# EAGLE board PR8003 (EAGLE 6.6.0)
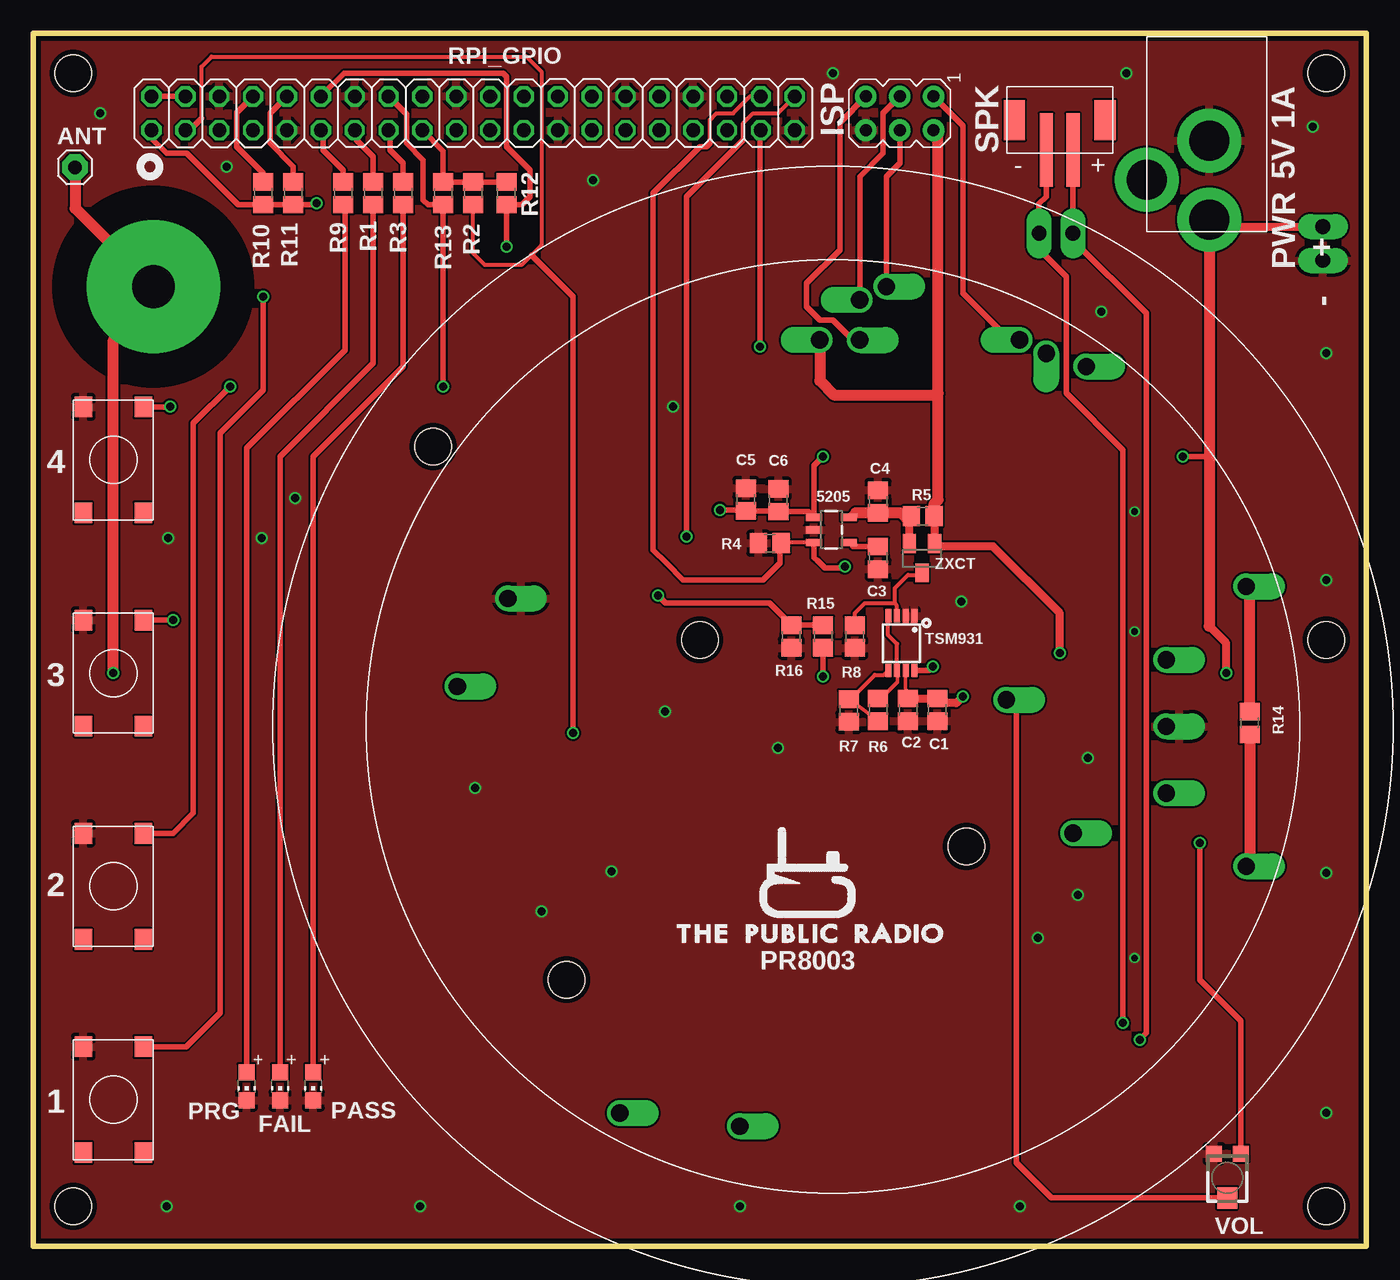
[diagram p0: board, top side]
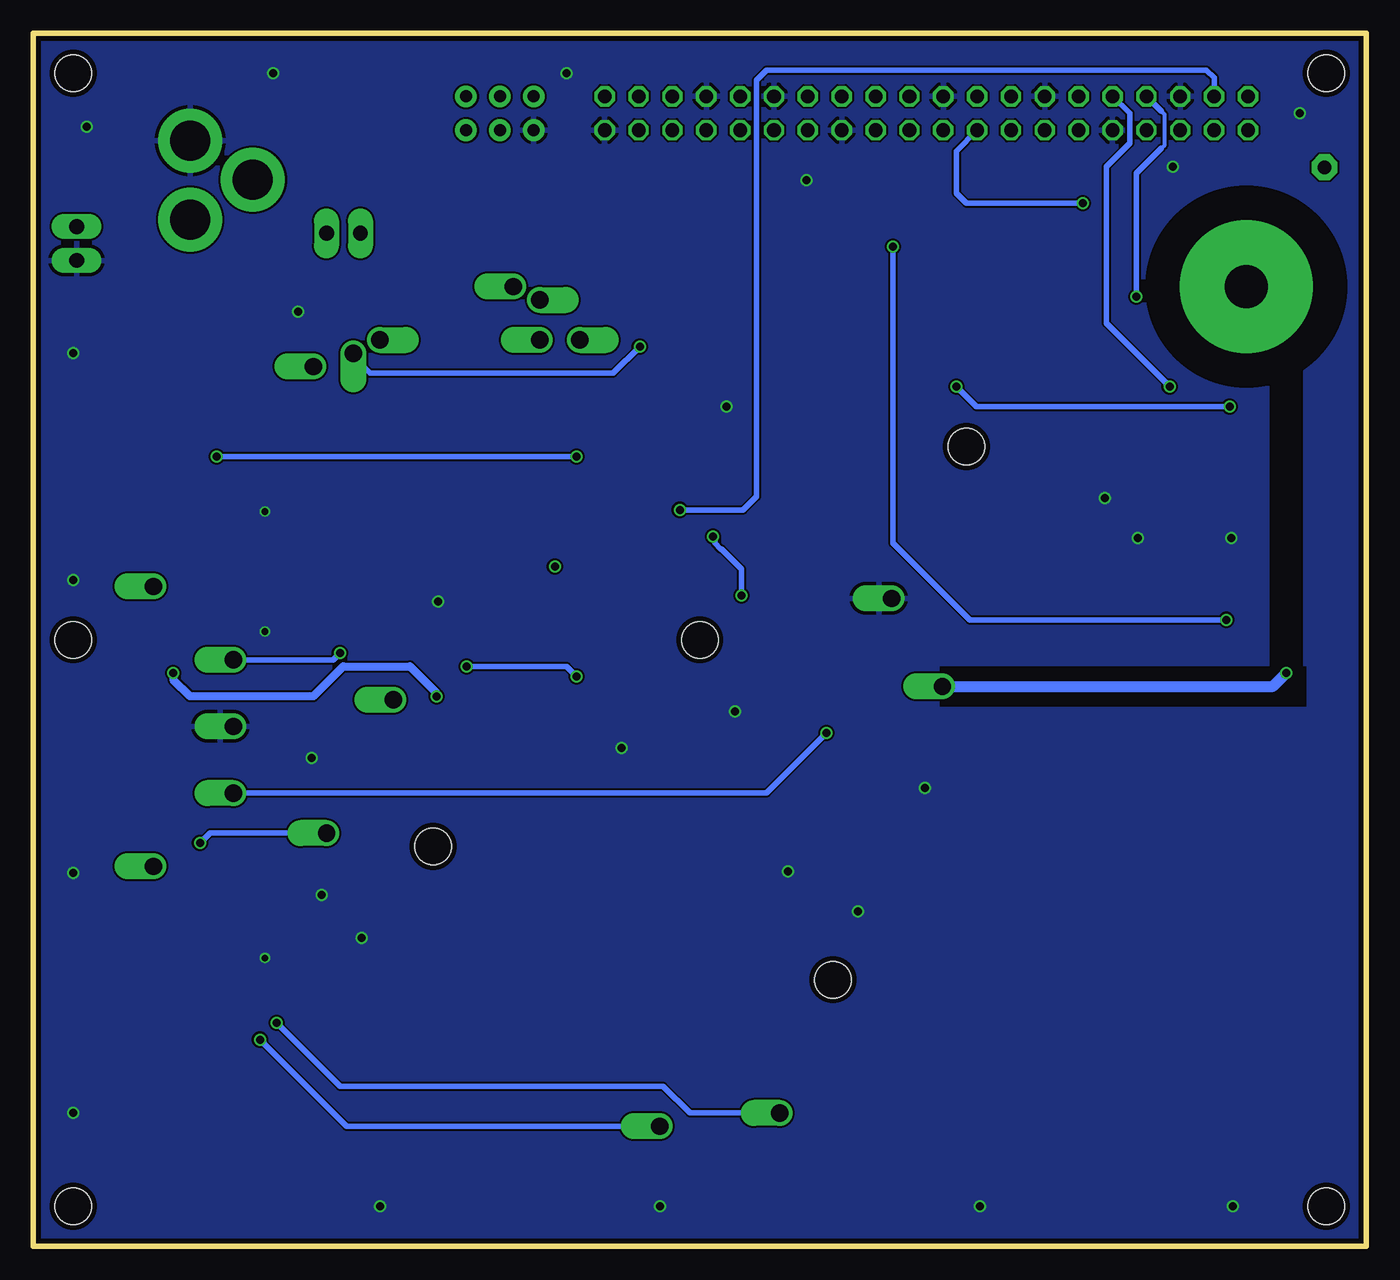
[diagram p1: board, bottom side, seen from below]

Size 100 x 91 mm. Coordinates in mm from the lower left corner, seen from the top.
Outline: 0,0 100,0 100,91 0,91 0,0
Copper layers (1*16): Top 0.0356mm / dielectric 1.5011mm / Bottom 0.0356mm
Design rules "LaenPCBOrder *": minimum track width 6mil, minimum drill 13mil, track to track 6mil, track to pad 6mil, pad to pad 6mil, via to via 6mil, smd to smd 6mil, copper to edge 15mil, drill to drill 6mil, minimum pad ring 7mil, minimum via ring 5mil, stop-mask expansion 3mil, vias tented up to drill 0mil, thermal gap 10mil
Net classes: 1 antenna: clearance 1.27 mm
Holes 2.75 mm at 3,3 3,88 97,88 50,45.5 97,3 70,30 40,20 97,45.5 30,60
bRestrict: area 4.5,40.5 to 32,43.5; area 4.8,43.5 to 7.2,68

## Footprints (pad centres in the part's own frame; a part is rotated, then mirrored left to right if it is on the bottom)
SOT23-5 = smd 0.55 x 1.2: 1 -0.95,-1.3; 2 0,-1.3; 3 0.95,-1.3; 4 0.95,1.3; 5 -0.95,1.3
1X01 = drill 1.016 pad 1.93 octagon: 1 0,0
C0805 = smd 1.3 x 1.5: 1 -0.85,0; 2 0.85,0
0805_ADAFRUIT = smd 1.3 x 1.5: 1 -0.85,0; 2 0.85,0
JST-B2B-PH-SM4-TB = smd 1 x 5.5: 1 1,-2.75; 2 -1,-2.75 | smd 1.6 x 3: NC1 -3.4,-0.5; NC2 3.4,-0.5
CHIP-LED0805 = smd 1.2 x 1.2: A 0,-1.05; C 0,1.05
AVRISP = drill 0.9 pad 1.626: 1 -1.27,2.54; 2 1.27,2.54; 3 -1.27,0; 4 1.27,0; 5 -1.27,-2.54; 6 1.27,-2.54
M3_BOLT_HOLE = drill 3.2 pad 10: P$1 0,0
1X02_LONGPADS = drill 1.118 pad 1.88 long: 1 0,0; 2 2.54,0
2X20 = drill 1.016 octagon: 1 -24.13,-1.27; 2 -24.13,1.27; 3 -21.59,-1.27; 4 -21.59,1.27; 5 -19.05,-1.27; 6 -19.05,1.27; 7 -16.51,-1.27; 8 -16.51,1.27; 9 -13.97,-1.27; 10 -13.97,1.27; 11 -11.43,-1.27; 12 -11.43,1.27; 13 -8.89,-1.27; 14 -8.89,1.27; 15 -6.35,-1.27; 16 -6.35,1.27; 17 -3.81,-1.27; 18 -3.81,1.27; 19 -1.27,-1.27; 20 -1.27,1.27; 21 1.27,-1.27; 22 1.27,1.27; 23 3.81,-1.27; 24 3.81,1.27; 25 6.35,-1.27; 26 6.35,1.27; 27 8.89,-1.27; 28 8.89,1.27; 29 11.43,-1.27; 30 11.43,1.27; 31 13.97,-1.27; 32 13.97,1.27; 33 16.51,-1.27; 34 16.51,1.27; 35 19.05,-1.27; 36 19.05,1.27; 37 21.59,-1.27; 38 21.59,1.27; 39 24.13,-1.27; 40 24.13,1.27
MSOP8 = smd 0.45 x 1: 1 -0.975,-2.05; 2 -0.325,-2.05; 3 0.325,-2.05; 4 0.975,-2.05; 5 0.975,2.05; 6 0.325,2.05; 7 -0.325,2.05; 8 -0.975,2.05
PJ-102A = drill 3 pad 4.8: RING 0.1,-3.39; RING_SW -4.6,-6.29; TIP 0.1,-9.29
C&K_PTS645_SMT = smd 1.55 x 1.3: P$1 -3.975,2.25; P$2 3.975,2.25; P$3 -3.975,-2.25; P$4 3.975,-2.25
PR9020_TESTPOINTS = drill 1.3 pad 1.3 offset: P$1 10.6,44.6; P$2 60,35; P$3 60,30; P$4 60,40; P$5 34,64; P$6 19,6; P$7 28,5; P$8 51,63; P$9 54,62; P$10 49,64; P$11 37,67; P$12 37,64; P$13 39,68; P$14 66,24.5; P$15 66,45.5; P$16 53,27; P$17 48,37; P$18 6.8,38
TC33X = smd 1.2 x 1.2: 1 -1,-1.825; 3 1,-1.825 | smd 1.5 x 1.6: 2 0,1.5
SOT23 = smd 1 x 1.4: 1 -0.95,-1.1; 2 0.95,-1.1; 3 0,1.1

## Placement (x,y rotation side)
5205  MIC5219 3.3V  [SOT23-5]  59.88,53.75 270 top
ANT  [1X01]  3.12,80.95 0 top
C1  2.2uF  [C0805]  67.83,40.25 270 top
C2  .1nF  [0805_ADAFRUIT]  65.62,40.25 270 top
C3  470pF  [0805_ADAFRUIT]  63.38,51.65 270 top
C4  4.7uF  [C0805]  63.38,55.88 90 top
C5  .1uF  [0805_ADAFRUIT]  53.45,56.02 90 top
C6  10nF  [C0805]  55.9,55.98 90 top
CN1  [JST-B2B-PH-SM4-TB]  77,85 0 top
FAIL  [CHIP-LED0805]  18.5,12 180 top
ISP  AVRISP-6  [AVRISP]  65,85 270 top
J1  M3_SCREW_POST  [M3_BOLT_HOLE]  9,72 0 top
JP2  M02PTH3  [1X02_LONGPADS]  78,76 180 top
JP3  M02PTH3  [1X02_LONGPADS]  96.75,76.5 270 top
PASS  [CHIP-LED0805]  21,12 180 top
PRG  [CHIP-LED0805]  16,12 180 top
R1  1k  [0805_ADAFRUIT]  25.5,79 270 top
R2  4.7k  [0805_ADAFRUIT]  33,79 270 top
R3  1k  [0805_ADAFRUIT]  27.75,79 270 top
R4  4.7k  [0805_ADAFRUIT]  55.25,52.75 0 top
R5  2ohm  [0805_ADAFRUIT]  66.72,54.77 180 top
R6  47k  [0805_ADAFRUIT]  63.38,40.25 90 top
R7  2.4M  [0805_ADAFRUIT]  61.17,40.2 270 top
R8  1.5K  [0805_ADAFRUIT]  61.62,45.75 270 top
R9  1k  [0805_ADAFRUIT]  23.25,79 270 top
R10  4.7k  [0805_ADAFRUIT]  17.25,79 90 top
R11  4.7k  [0805_ADAFRUIT]  19.5,79 90 top
R12  4.7k  [0805_ADAFRUIT]  35.5,79 270 top
R13  4.7k  [0805_ADAFRUIT]  30.75,79 270 top
R14  0 OHM  [0805_ADAFRUIT]  91.25,39.25 270 top
R15  2.2K  [0805_ADAFRUIT]  59.25,45.75 90 top
R16  3.3K  [0805_ADAFRUIT]  56.88,45.75 270 top
RPI_GPIO  [2X20]  33,85 0 top
TSM931  TSM931  [MSOP8]  65.12,45.25 180 top
U$1  [PR_LOGO]  58.08,28.35 0 top
U$19  2.1MMJACKTHM  [PJ-102A]  88.12,86.33 0 top
U$20  C&K_PTS645  [C&K_PTS645_SMT]  6,11 90 top
U$22  C&K_PTS645  [C&K_PTS645_SMT]  6,43 90 top
U$23  C&K_PTS645  [C&K_PTS645_SMT]  6,27 90 top
U$24  C&K_PTS645  [C&K_PTS645_SMT]  6,59 90 top
U$26  PR9020_TESTPOINTS  [PR9020_TESTPOINTS]  25,4 0 top
VOL  [TC33X]  89.58,5.12 180 top
ZXCT  ZXCT1009  [SOT23]  66.67,51.62 180 top

## Library data of the parts
5205 = SparkFun-PowerIC; PROD_ID: VREG-5205-3.0
ANT C1 C4 C6 FAIL ISP PASS PRG RPI_GPIO U$19 VOL = adafruit
C2 C3 C5 R1-R4 R6 R7 R9-R16 TSM931 U$1 U$26 ZXCT = PR_Parts_Library
CN1 = PR_Parts_Library; MFG_PN: B2B-PH-SM4-TB(LF)(SN)
J1 = PR_Parts_Library; MFG_PN: DNP
JP2 JP3 = SparkFun-Connectors
R5 = PR_Parts_Library; POWER: .5W; TOL: 1%
R8 = PR_Parts_Library; TOL: 1%
U$20 U$22-U$24 = PR_Parts_Library; MFG_PN: PTS645SM43SMTR92 LFS

## Nets
3.3V: ISP.2 R5.1 U$26.P$4 U$26.P$5 ZXCT.1
+3V3: R2.1 R10.1 R11.1 R12.1 R13.1 RPI_GPIO.1 RPI_GPIO.17
+5V: 5205.1 C1.1 C2.1 C5.1 C6.1 JP3.1 RPI_GPIO.2 RPI_GPIO.4 TSM931.7 U$19.TIP
A_IN: U$26.P$16 VOL.1
A_OUT: U$26.P$17 VOL.2
ANT: ANT.1 J1.P$1 U$26.P$18
COMPARATOR: R15.2 R16.1 RPI_GPIO.40
DEV_PRES: R2.2 RPI_GPIO.3 U$26.P$3
FAIL: R1.1 RPI_GPIO.13
GND: 5205.2 C1.2 C2.2 C3.2 C4.2 C5.2 C6.2 FAIL.C ISP.6 JP3.2 PASS.C PRG.C R4.1 R7.2 R8.2 R16.2 RPI_GPIO.6 RPI_GPIO.9 RPI_GPIO.14 RPI_GPIO.20 RPI_GPIO.25 RPI_GPIO.30 RPI_GPIO.34 RPI_GPIO.39 TSM931.1 TSM931.2 U$19.RING U$20.P$2 U$22.P$2 U$23.P$2 U$24.P$2 U$26.P$1 U$26.P$2 VOL.3
GPIO3: RPI_GPIO.5
GPIO4: RPI_GPIO.7
GPIO5: RPI_GPIO.29
GPIO6: RPI_GPIO.31
GPIO7: RPI_GPIO.26
GPIO8: RPI_GPIO.24
GPIO9: RPI_GPIO.21
GPIO10: RPI_GPIO.19
GPIO11: RPI_GPIO.23
GPIO12: RPI_GPIO.32
GPIO13: RPI_GPIO.33
GPIO16: RPI_GPIO.36
GPIO19: RPI_GPIO.35
GPIO24: RPI_GPIO.18
GPIO25: RPI_GPIO.22
ID_SC: RPI_GPIO.28
ID_SD: RPI_GPIO.27
MISO: ISP.1 U$26.P$10
MOSI: ISP.4 U$26.P$13
N$1: R6.2 TSM931.4 TSM931.6
N$2: PRG.A R9.2
N$3: FAIL.A R1.2
N$4: PASS.A R3.2
N$6: R15.1 TSM931.8
N$12: R8.1 TSM931.3 ZXCT.3
N$13: 5205.4 C3.1
N$14: 5205.5 C4.1 R5.2 ZXCT.2
N$15: R6.1 R7.1 TSM931.5
N$18: U$26.P$9
PASS: R3.1 RPI_GPIO.15
PROCESS: R9.1 RPI_GPIO.11
REG_ENABLE: 5205.3 R4.2 RPI_GPIO.38
RST: ISP.5 U$26.P$12
SCK: ISP.3 U$26.P$11
SPK_OUT+: CN1.2 JP2.2 U$26.P$6
SPK_OUT-: CN1.1 JP2.1 U$26.P$7
SW_IN: R14.2 U$26.P$14
SW_OUT: R14.1 U$26.P$15
TAC1: R10.2 RPI_GPIO.8 U$20.P$4
TAC2: R11.2 RPI_GPIO.10 U$23.P$4
TAC3: R12.2 RPI_GPIO.12 U$22.P$4
TAC4: R13.2 RPI_GPIO.16 U$24.P$4
TACSW: RPI_GPIO.37 U$26.P$8

## Tracks (layer width: path | path; a pad name or v marks a point on that pad's centre or on a via)
3.3V  (via drill 0.6)
  Top 0.305: 67.33,54.52 R5.1
  Top 0.406: 67.88,54.62 R5.1 67.25,54.65 | 67.5,83.69 ISP.2
  Top 0.61: ZXCT.1 67.62,54.73 R5.1 | 67.85,52.5 72,52.5 77,47.5 v77,44.5
  Top 0.813: 67.85,52.5 ZXCT.1 | U$26.P$5 59,64.94 60.06,63.88 67.75,63.88 67.88,64 | R5.1 67.58,55.7 67.88,56 67.88,64 | 67.88,64 67.88,83.39 ISP.2
  Bottom 0.406: U$26.P$4 77.5,44 v77,44.5
+3V3  (via drill 0.6)
  Top 0.406: RPI_GPIO.1 9,83.6 9,83 10,82 11.5,82 15.35,78.15 R10.1 R11.1 21.15,78.15 v21.25,78.25 | RPI_GPIO.17 30.75,82.17 R13.1 R2.1 R12.1
  Bottom 0.406: RPI_GPIO.17 30.75,82.17 30.75,79 30,78.25 21.75,78.25 v21.25,78.25
+5V  (via drill 0.6)
  Top 0.254: C2.1 65.62,41.62 65.44,41.81 65.44,43.19 TSM931.7
  Top 0.305: 55.85,55.17 C6.1 | 58.15,55.12 5205.1
  Top 0.406: 55.85,55.17 C5.1 53.38,55.25 v51.5,55.25 | C6.1 58.15,55.12 | 88.76,76.5 U$19.TIP | RPI_GPIO.2 RPI_GPIO.4 | 5205.1 58.58,58.58 v59.25,59.25 | v86.25,59.25 88.22,59.25
  Top 0.61: C2.1 C1.1 68.17,40.75 69.25,40.75 v69.75,41.25 | 88.76,76.5 JP3.1 | v89.5,43 89.5,45.25 88.22,46.52
  Top 0.813: U$19.TIP 88.22,59.25 88.22,46.52
  Bottom 0.406: RPI_GPIO.4 11.41,87.66 12,88.25 45,88.25 45.75,87.5 45.75,56.25 46.75,55.25 v51.5,55.25 | v59.25,59.25 v86.25,59.25 | 69.75,41.5 v69.75,41.25 | 89.5,42.5 v89.5,43
  Bottom 0.61: 69.75,41.5 71.75,43.5 76.75,43.5 79,41.25 88.25,41.25 89.5,42.5
A_IN  (via drill 0.6)
  Top 0.406: VOL.1 90.58,16.93 87.5,20 v87.5,30.25
  Bottom 0.406: U$26.P$16 86.75,31 v87.5,30.25
A_OUT
  Top 0.406: U$26.P$17 73.75,40.25 73.75,6.25 76.38,3.62 VOL.2
ANT  (via drill 0.6)
  Top 0.406: 8.9,72 J1.P$1
  Top 0.813: ANT.1 3.12,77.88 J1.P$1 9,71 6,68 v6,43
  Bottom 0.813: U$26.P$18 7,42 v6,43
COMPARATOR  (via drill 0.6)
  Top 0.305: 53.25,83 53.25,84.25 54,85 55.86,85 RPI_GPIO.40
  Top 0.406: v49,53.25 49,78.75 53.25,83 | R15.2 R16.1 55.23,48.25 47.44,48.25 v46.88,48.81
  Bottom 0.406: v46.88,48.81 46.88,50.81 48.38,52.31 48.44,52.31 48.88,52.75 48.88,53.12 v49,53.25
DEV_PRES  (via drill 0.6)
  Top 0.305: 12.62,84.62 12.62,88.5 13.38,89.25 37,89.25 38.12,88.12 38.12,75.12 37.38,74.38 36.62,73.62 33.88,73.62 33,74.5 R2.2
  Top 0.406: RPI_GPIO.3 11.73,83.73 12.62,84.62 | v40.5,38.5 40.5,71.25 37.38,74.38
  Bottom 0.406: U$26.P$3 45,34 v40.5,38.5
FAIL
  Top 0.406: R1.1 25.5,81.75 24.25,83 24.25,83.59 RPI_GPIO.13
GND  (via drill 0.5, 0.6)
  other vias: 38.12,25.12 43.38,28.12 78.38,26.38 75.38,23.12 47.38,40.12 33.12,34.38 55.88,37.38 10,3 29,3 53,3 74,3 97,10 97,28 97,50 97,67 96,84 5,85 17.12,53.12 10.12,53.12 19.62,56.12 80.12,70.12 82.62,21.62 82.62,55.12 82.62,46.12 82,88 60,88 42,80 14.5,81 48,63 69.62,48.38 79.12,36.62
  pour Top: 0,91 100,91 100,0 0,0
  pour Bottom: 0,0 100,0 100,91 0,91
MISO
  Top 0.406: U$26.P$10 73.25,68 69.75,71.5 69.75,84.06 ISP.1
MOSI
  Top 0.406: U$26.P$13 64,80.25 65,81.25 ISP.4
N$1
  Top 0.254: 64.75,42.25 64.81,42.31 64.81,43.19 TSM931.6
  Top 0.305: TSM931.4 64.12,47.27 64.12,45.88 64.8,45.2 TSM931.6 64.75,43.15 | R6.2 63.62,41.12 64.75,42.25
N$2
  Top 0.406: PRG.A 16,59.88 23.38,67.25 23.38,78.03 R9.2
N$3
  Top 0.406: FAIL.A 18.5,59.25 25.5,66.25 R1.2
N$4
  Top 0.406: PASS.A 21,59.25 27.75,66 R3.2
N$6  (via drill 0.6)
  Top 0.406: TSM931.8 67.2,43.2 v67.5,43.5 | v59.25,42.75 R15.1
  Bottom 0.406: v67.5,43.5 60,43.5 v59.25,42.75
N$12
  Top 0.305: 61.48,46.75 R8.1 61.62,47.5 62.38,48.25 64.62,48.25 | 64.62,48.25 64.75,48.12 64.75,47.35 TSM931.3 | 64.62,48.25 64.62,49.38 65.62,50.38 66.22,50.38 ZXCT.3
N$13
  Top 0.305: 61.48,52.5 5205.4
  Top 0.406: 61.48,52.85 5205.4 | C3.1 61.48,52.5
N$14
  Top 0.406: 61.69,55 61.48,55 5205.5
  Top 0.61: ZXCT.2 65.72,54.62 R5.2
  Top 0.813: 65.72,54.62 65.5,54.62 65.12,55 63.4,55 C4.1 61.71,55.02 61.69,55
N$15
  Top 0.305: TSM931.5 63.83,42.88 63.12,42.88 61.62,41.38 R7.1 R6.1
N$21
  pour Bottom: 
PASS
  Top 0.406: R3.1 27.75,81.25 26.75,82.25 26.75,83.63 RPI_GPIO.15
PROCESS
  Top 0.406: R9.1 23.25,80.75 21.75,82.25 21.75,83.55 RPI_GPIO.11
REG_ENABLE  (via drill 0.6)
  Top 0.305: 5205.3 56.15,52.8 | RPI_GPIO.38 53.77,86.27 52.5,85 51.25,85 50.75,84.5 50.75,83 | 56,52.65 R4.2
  Top 0.406: 56.15,52.8 R4.2 | v60.88,51 60.75,50.88 59.38,50.88 58.83,51.42 58.58,51.67 5205.3 | 56,52.65 56,51.25 54.75,50 48.75,50 47.5,51.25 46.5,52.25 46.5,79 50,82.5 50.5,82.5 50.75,82.75 50.75,83
RST
  Top 0.406: U$26.P$12 61.5,68 60,69.5 59,69.5 58,70.5 58,72.25 60.5,74.75 60.5,84.31 ISP.5
SCK
  Top 0.406: U$26.P$11 62,80.25 63.75,82 63.75,85.02 ISP.3
SPK_OUT+  (via drill 0.6)
  Top 0.406: CN1.2 76,78.75 75.46,78.21 JP2.2 75.5,75.96 75.5,74.75 77.5,72.75 77.5,64 81.75,59.75 v81.75,16.75
  Bottom 0.406: U$26.P$6 50.75,10 52.75,12 77,12 v81.75,16.75
SPK_OUT-  (via drill 0.6)
  Top 0.406: CN1.1 JP2.1 78,75.5 83.5,70 83.5,16 v83,15.5 | CN1.1 78,83 77.75,83.25 77.75,82.5 CN1.1
  Bottom 0.406: U$26.P$7 76.5,9 v83,15.5
SW_IN
  Top 0.813: R14.2 91.25,28.75 U$26.P$14
SW_OUT
  Top 0.813: R14.1 91.25,49.25 U$26.P$15
TAC1  (via drill 0.6)
  Top 0.406: RPI_GPIO.8 15.25,85.03 15.25,82.5 17.25,80.5 R10.2 | U$20.P$4 11.47,14.97 14,17.5 14,61 17.25,64.25 v17.25,71.25
  Bottom 0.305: 15.38,82.38 15.12,82.62 15.12,84.91 15.38,85.16
  Bottom 0.406: v17.25,71.25 17.25,80.5 15.38,82.38 | 15.38,85.16 RPI_GPIO.8
TAC2  (via drill 0.6)
  Top 0.406: RPI_GPIO.10 17.75,84.99 17.75,82.75 19.5,81 R11.2 | U$23.P$4 10.47,30.98 12,32.5 12,61.75 v14.75,64.5
  Bottom 0.406: RPI_GPIO.10 17.75,84.99 17.75,82.75 19.5,81 19.5,69.25 v14.75,64.5
TAC3  (via drill 0.6)
  Top 0.406: RPI_GPIO.12 23.3,88 35.25,88 35.5,87.75 35.5,82.5 37.25,80.75 37.25,78.75 36.65,78.15 R12.2 v35.5,75 | U$22.P$4 10.47,46.98 v10.5,47
  Bottom 0.406: v10.5,47 29.75,47 35.5,52.75 v35.5,75
TAC4  (via drill 0.6)
  Top 0.406: U$24.P$4 10.22,62.98 v10.25,63 | RPI_GPIO.16 28,84.92 28,82.75 29.25,81.5 29.25,78.5 29.6,78.15 R13.2 v30.75,64.5
  Bottom 0.406: v10.25,63 29.25,63 v30.75,64.5
TACSW  (via drill 0.6)
  Top 0.406: v54.5,67.5 54.5,83.64 RPI_GPIO.37
  Bottom 0.406: U$26.P$8 76,66.75 74.75,65.5 56.5,65.5 v54.5,67.5

## Text on the board
tPlace: SPK | - + | 4 | 3 | 2 | 1
tNames: 5V 1A | PWR | PR8003